# Altium PCB acqboard.PcbDoc (part 5 of 5)
Units mil, origin at the board's own origin, x right, y up, seen from the top; angles counter-clockwise.
Board outline 7000 x 5250 mil, 4 copper layers (Top Layer, Internal Plane 1, Internal Plane 2, Bottom Layer); 570 components, 356 nets, 1973 pads, 766 vias.
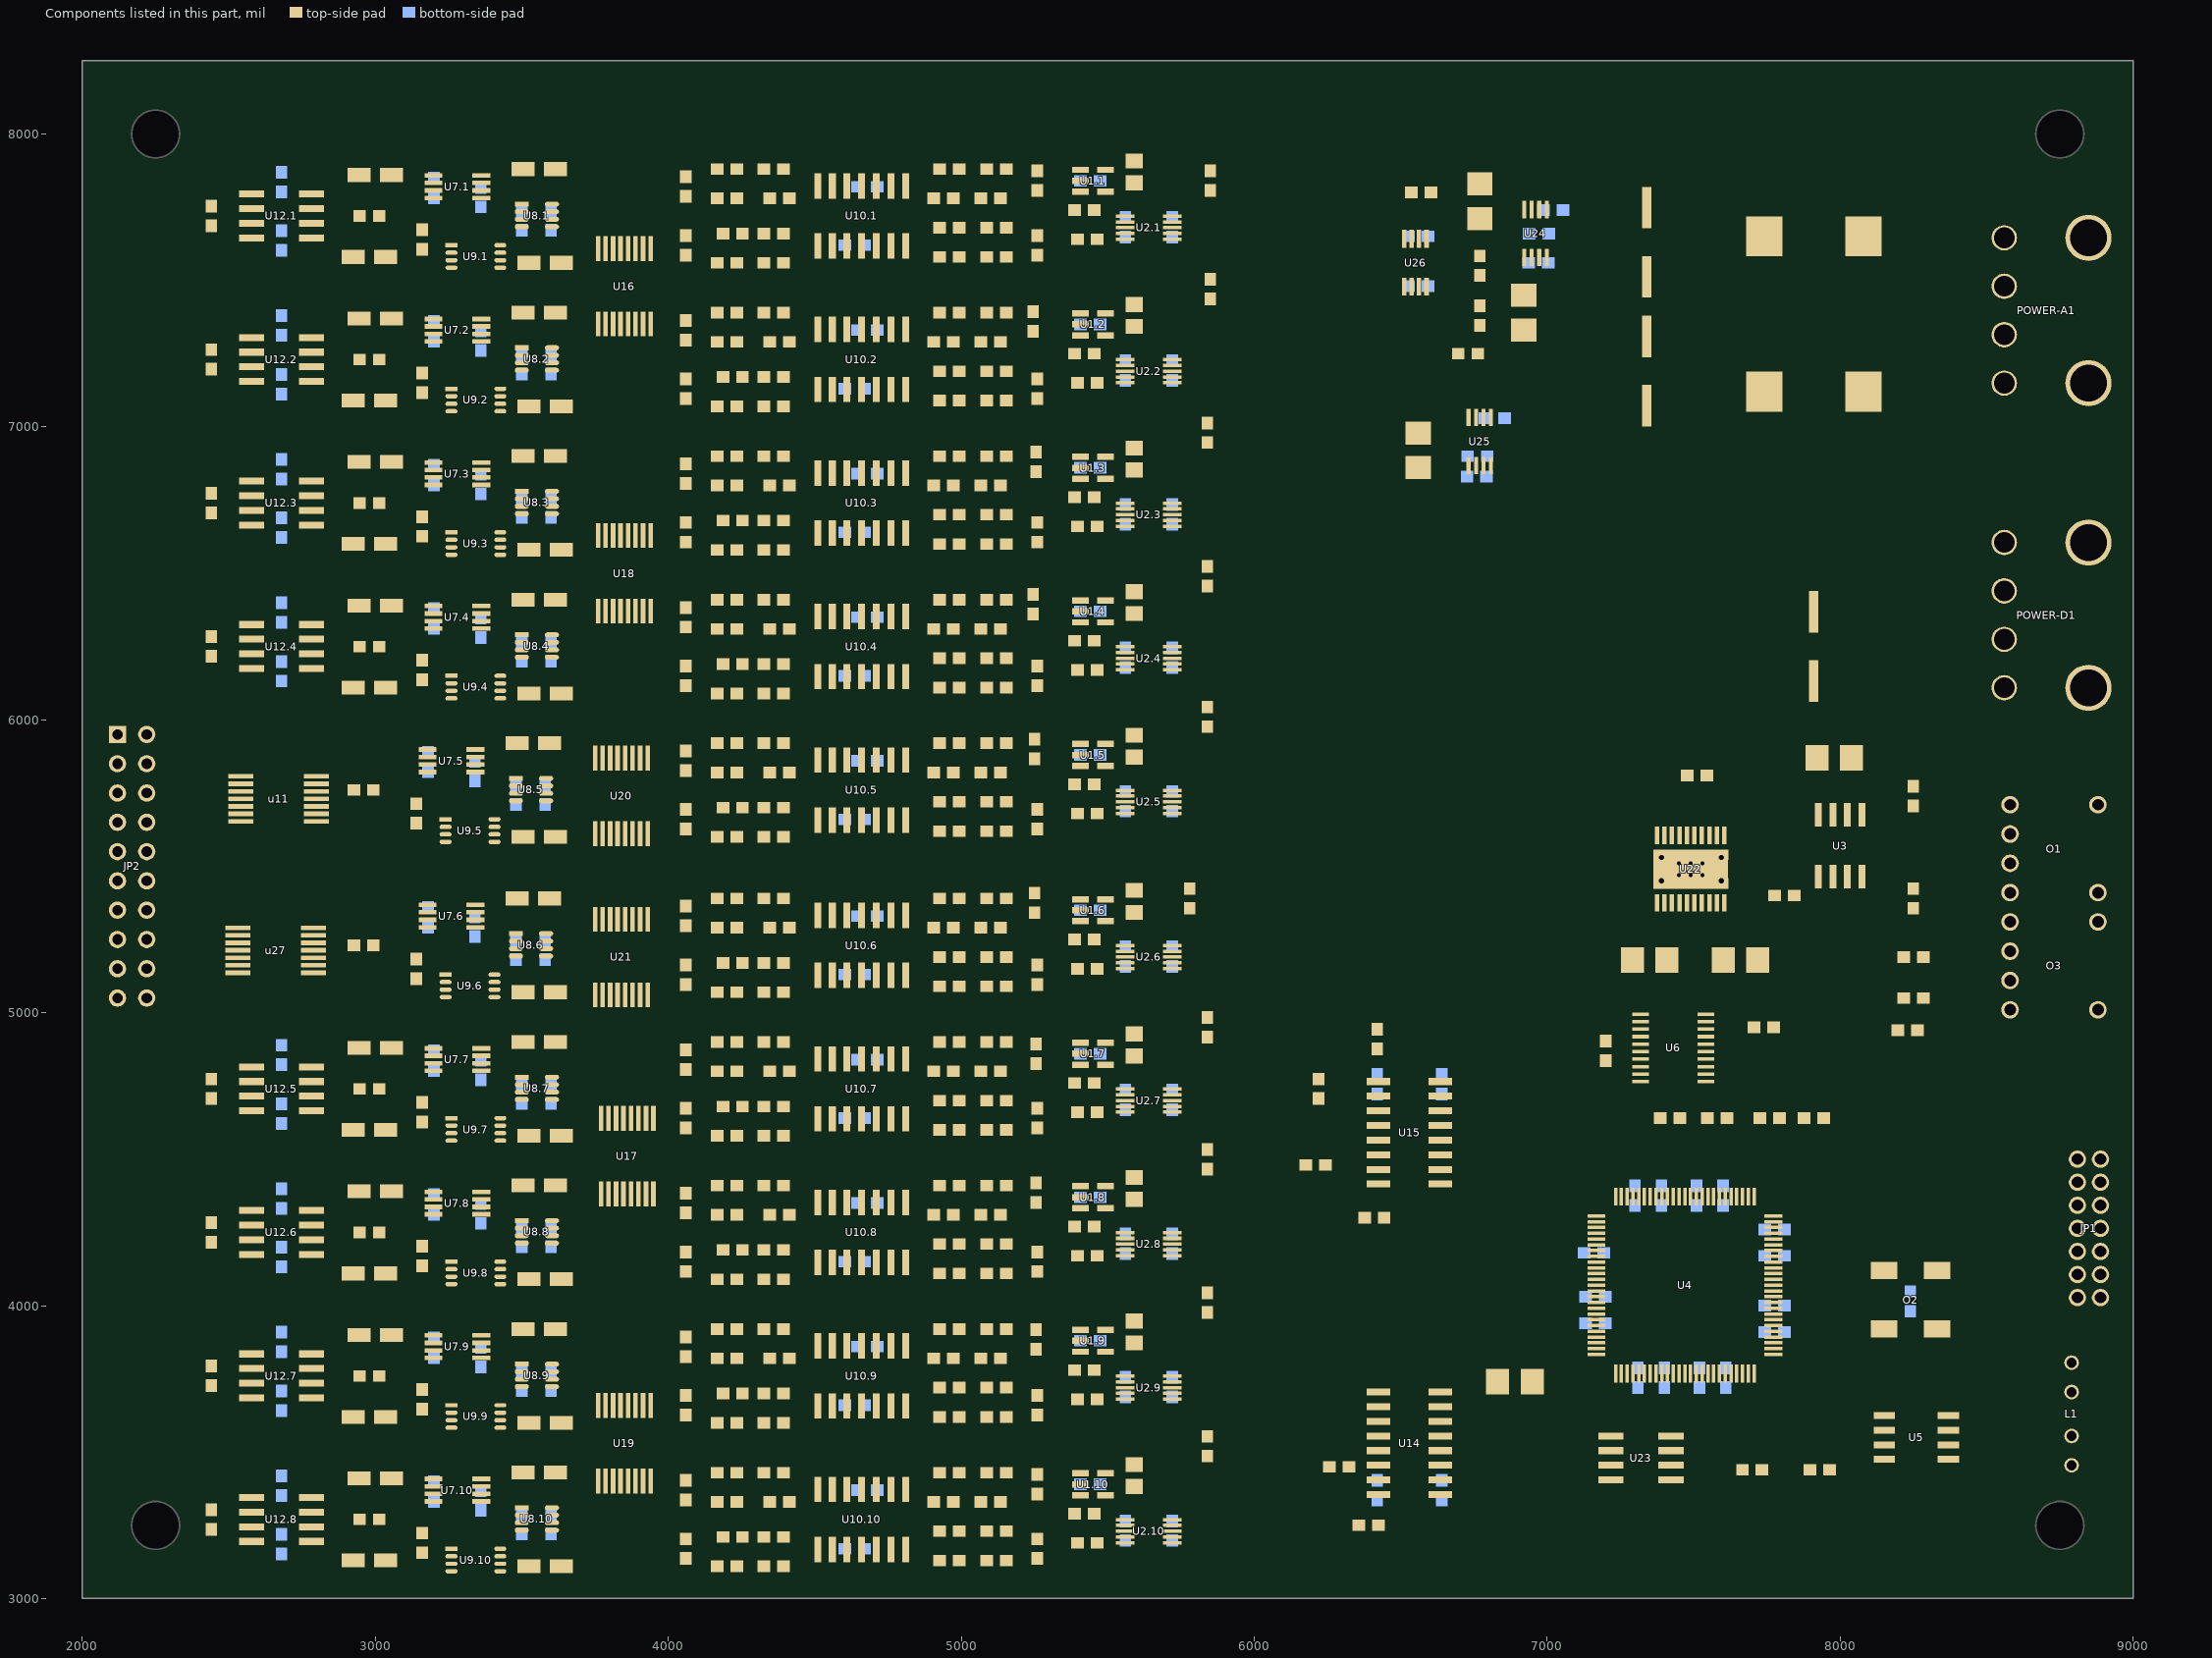
[diagram p7: the components of this part, seen from the top]

## Other copper (continued)
Bottom Layer:
  text "Layer 4" at 9400,4430 h60
Internal Plane 1 (plane layer: these items are gaps in the copper):
  lines w9.84: 5640,3160 5640,3110 5700,3050 5760,3050 ; 5640,3310 5640,3650 ; 5640,3800 5640,4140 ; 5640,4280 5640,4630 ; 5640,4770 5640,5120 ; 5640,5260 5640,5650 ; 5640,5790 5640,6150 ; 5640,6280 5640,6640 ; 5640,6770 5640,7120 ; 5640,7260 5640,7630 ; 5640,7730 5640,7790 5670,7820 5920,7820 6530,7210 6530,6200
  lines w10: 5700,3050 6530,3050 8950,3050 8950,6780 ; 6530,6060 6530,7210
  lines w20: 6530,3050 6530,6530 6660,6660 8050,6660 8170,6780 8950,6780
  text "Layer 2" at 9400,4650 h60
Internal Plane 2 (plane layer: these items are gaps in the copper):
  lines w10: 6530,3050 6530,6530 6660,6660 8050,6660 8170,6780 8950,6780 8950,3050 6530,3050
  text "Layer 3" at 9400,4540 h60

## Silkscreen, mask and mechanical layers (free items; w line width, h text height)
Top Overlay:
  drawing of 336 lines, arcs and shapes, not listed
  text "Soma Acquisition Board" at 6594,8082 h90
  text "Copyright Eric Jonas 2005" at 6584,8012 h40
  text "ver 4.5" at 7824,8012 h40
  text "soma.mit.edu" at 6584,7950 h35
  text "Wilson Lab, PCLM" at 7550,7950 h35
  text "Chan A1" at 2380,7510 h60
  text "ANALOG POWER" at 8450,7060 h60 r90
  text "Chan A2" at 2380,7020 h60
  text "Chan A3" at 2380,6530 h60
  text "DIGITAL POWER" at 8460,6050 h60 r90
  text "Chan A4" at 2380,6040 h60
  text "Chan AC" at 2380,5510 h60
  text "Chan BC" at 2380,4990 h60
  text "Chan B1" at 2380,4530 h60
  text "Chan B2" at 2380,4040 h60
  text "Chan B3" at 2380,3550 h60
  text "Chan B4" at 2380,3060 h60
Mechanical 1:
  lines w10: 2050,3500 6000,3500 ; 2050,3540 6000,3540 ; 2050,3990 6000,3990 ; 2050,4030 6000,4030 ; 2050,4480 6000,4480 ; 2050,4520 6000,4520 ; 2050,4970 6000,4970 ; 2050,5010 6000,5010 ; 2050,5460 6000,5460 ; 2050,5540 6000,5540 ; 2050,5990 6000,5990 ; 2050,6030 6000,6030 ; 2050,6480 6000,6480 ; 2050,6520 6000,6520 ; 2050,6970 6000,6970 ; 2050,7010 6000,7010 ; 2050,7500 6000,7500 ; 2380,3050 2380,7950 ; 6530,3050 6530,5970
Mechanical 5:
  the board outline again, w1
Drill Drawing:
  text ".LEGEND" at 9200,3200 h60
  text "Drill Drawing." at 9200,3100 h60

## Dimensions
2050,3050 to 8950,3050 on Mechanical 1
2050,3050 to 2050,8200 on Mechanical 1

## Text inside footprints (layer, text, board x,y; h text height)
JP2: Top Overlay "2" at 2200,6050 h50 r270; Top Overlay "1" at 2100,6050 h50 r270; Top Overlay "19" at 2100,4990 h50 r270; Top Overlay "20" at 2200,4990 h50 r270